# EAGLE board PiMobile.picked (EAGLE 7.5.0)
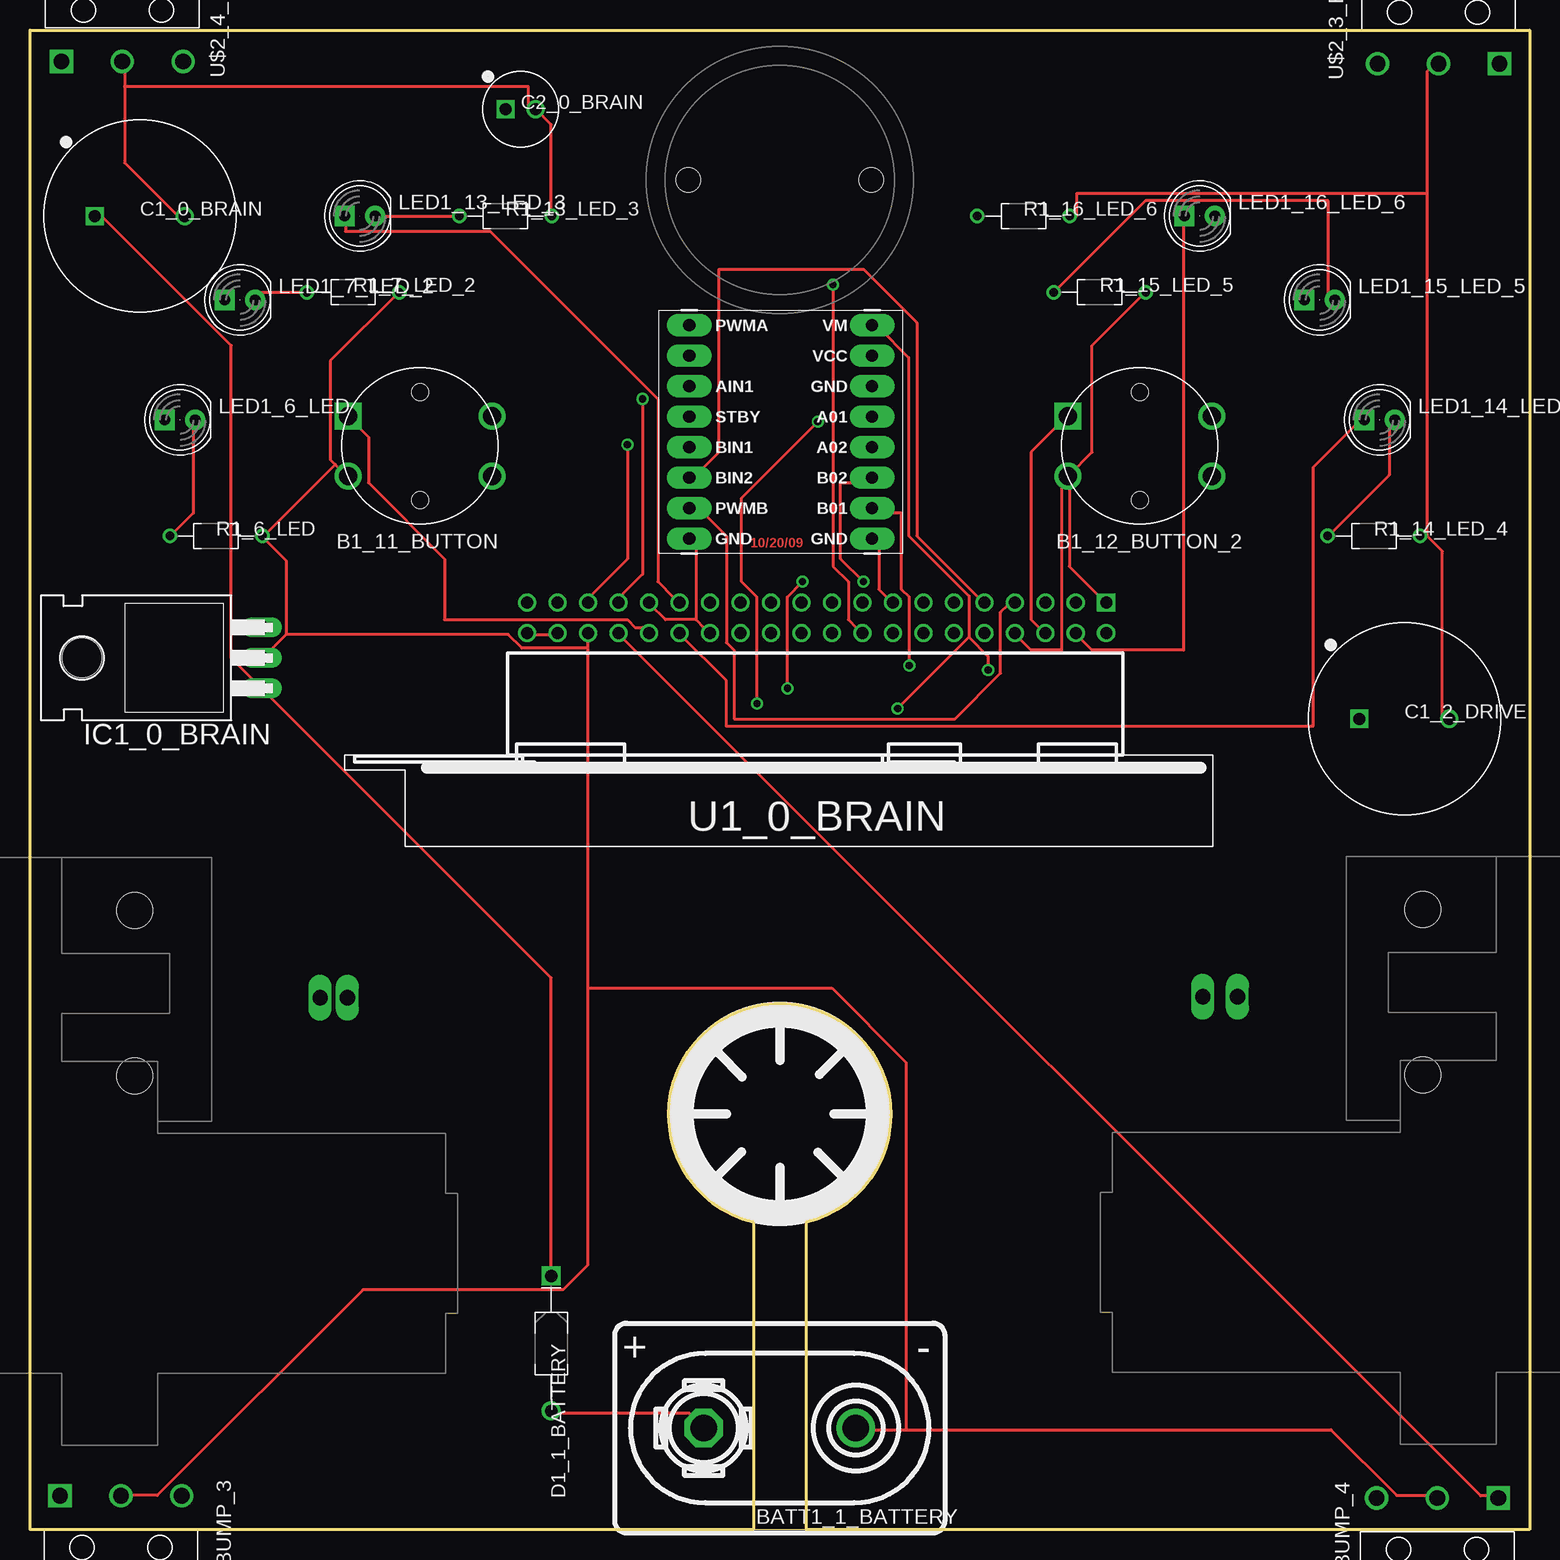
[diagram p0: board, top side]
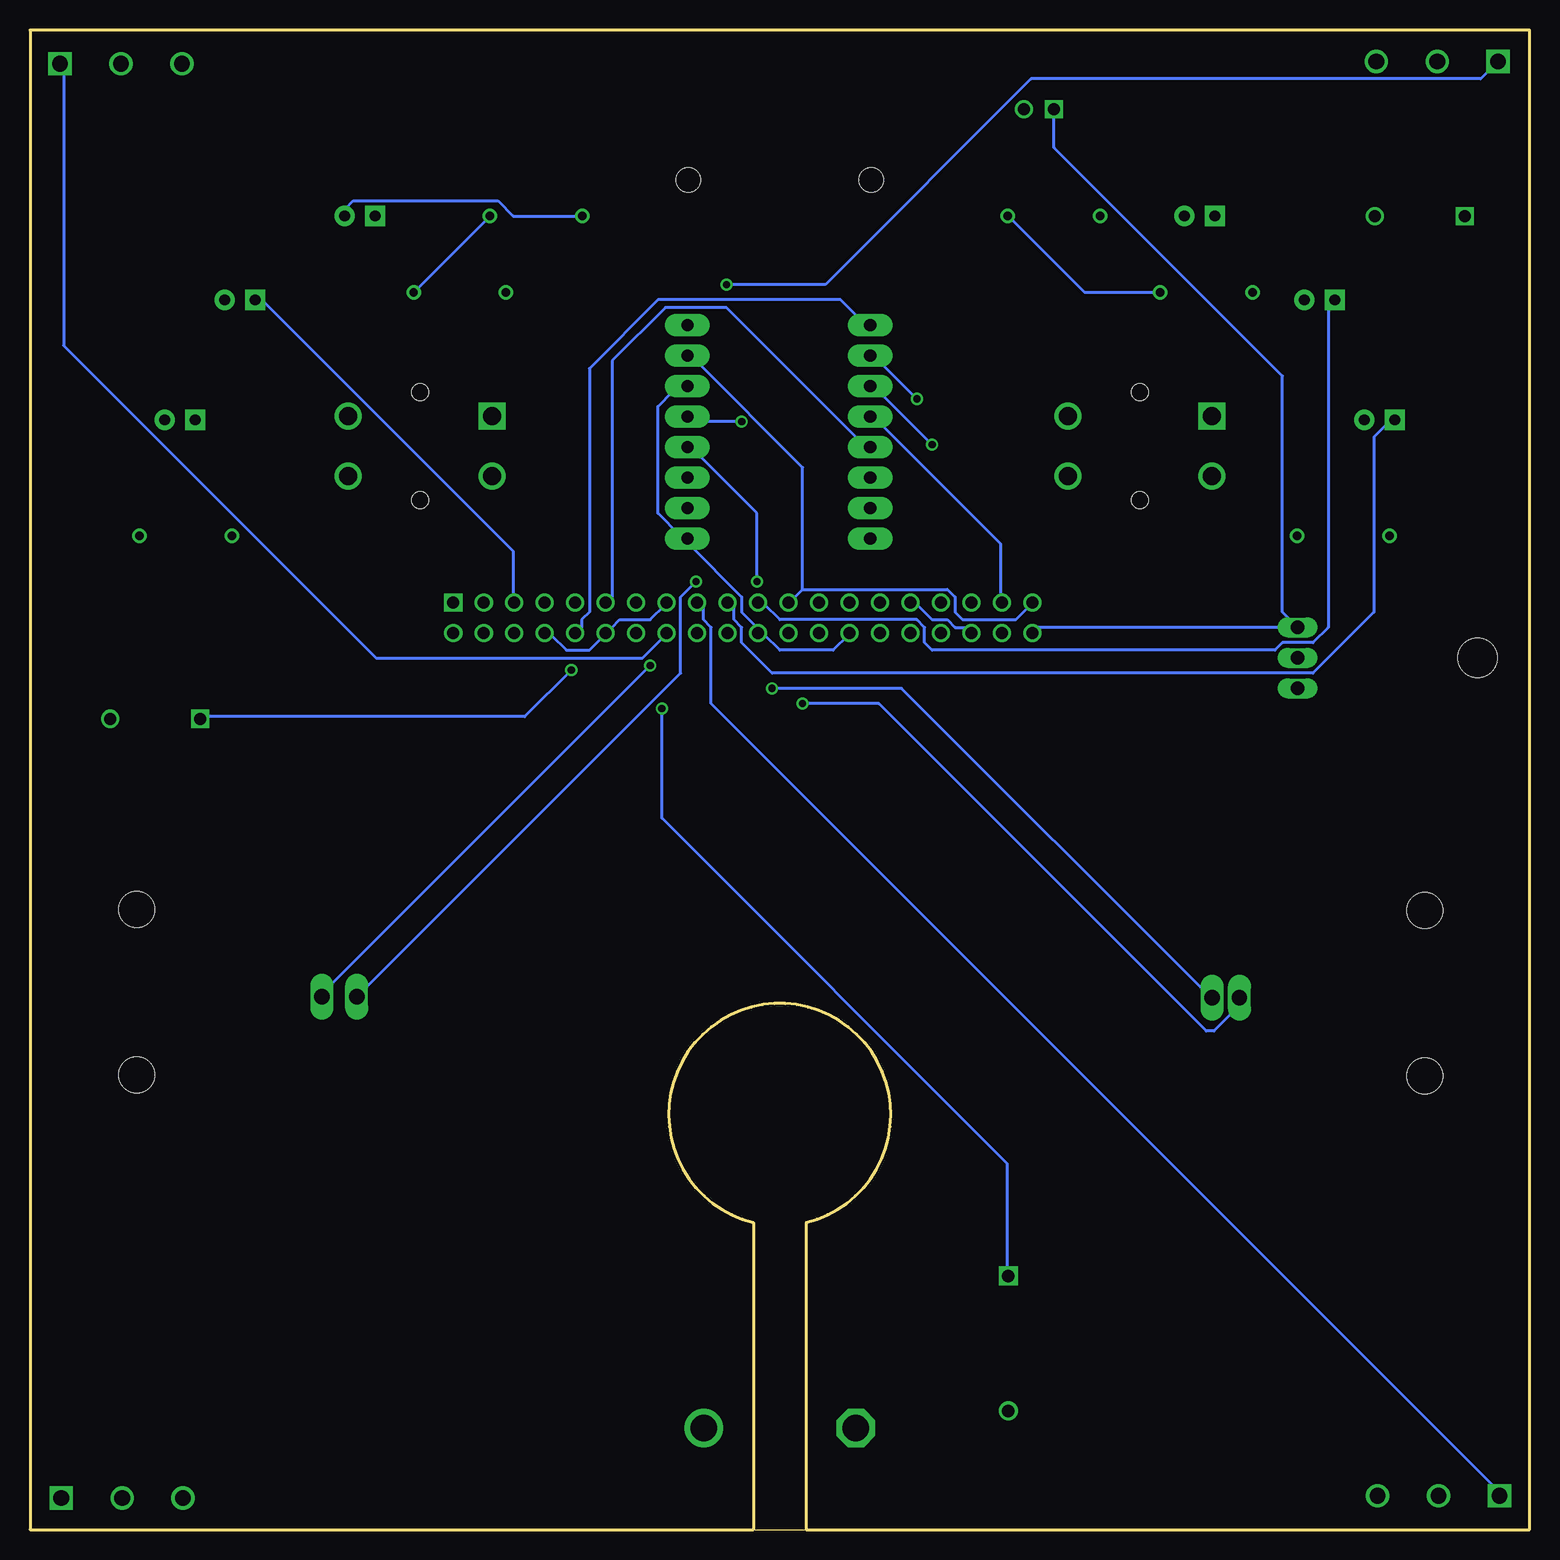
[diagram p1: board, bottom side, seen from below]

Size 125 x 125 mm. Coordinates in mm from the lower left corner, seen from the top.
Outline: 64.7,0 125,0 125,125 0,125 0,0 60.3,0
Outline: 64.7,0 60.3,0
Outline: 64.7,0 64.7,25.6 arc333 60.3,25.6 60.3,0
Copper layers (1*16): Top 0.035mm / dielectric 1.5mm / Bottom 0.035mm
Design rules "default": minimum track width 10mil, minimum drill 0.6mm, track to track 8mil, track to pad 8mil, pad to pad 8mil, via to via 8mil, smd to smd 8mil, copper to edge 40mil, drill to drill 8mil, minimum pad ring 10mil, minimum via ring 8mil, stop-mask expansion 4mil, vias tented up to drill 0mil, thermal gap 10mil

## Footprints (pad centres in the part's own frame; a part is rotated, then mirrored left to right if it is on the bottom)
BUTTON-TACTILE-ROUND-ADAFRUIT1009 = drill 1.5 square: P -6,2.5 | drill 1.5: P2 6,2.5; S -6,-2.5; S2 6,-2.5 | hole 1.4: 0,-4.5; 0,4.5
BATTERY_9V_KEYSTONE_968 = drill 2.2: N 6.35,0 | drill 2.2 octagon: P -6.35,0
CAPPRD750W80D1600H2200P = drill 1 pad 1.5 square: 1 -3.75,0 | drill 1 pad 1.5: 2 3.75,0
CAPPRD250W80D630H1220P = drill 1 pad 1.5 square: 1 -1.25,0 | drill 1 pad 1.5: 2 1.25,0
DIOAD1125W78L520D270_HS = drill 1.06 pad 1.59: A 5.625,0 | drill 1.06 pad 1.59 square: C -5.625,0
SPARKFUN_DUAL_MOTOR_DRIVER = drill 1.016 pad 1.88 long: A01 7.62,1.27; A02 7.62,-1.27; AIN1 -7.62,3.81; AIN2 -7.62,6.35; B01 7.62,-6.35; B02 7.62,-3.81; BIN1 -7.62,-1.27; BIN2 -7.62,-3.81; GND -7.62,-8.89; GND1 7.62,3.81; GND2 7.62,-8.89; PWMA -7.62,8.89; PWMB -7.62,-6.35; STBY -7.62,1.27; VCC 7.62,6.35; VM 7.62,8.89
TO220H = drill 1.118 long: 1 -2.54,-10.16; 2 0,-10.16; 3 2.54,-10.16 | hole 3.302: 0,4.826
SOLARBOTICS_G2_LEFT = drill 1.27 long: + -40.545,-3.68; - -43.45,-3.68 | hole 3: -25.1,-10.2; -25.1,3.6
LED5MM = drill 0.9 pad 1.676 square: A -1.27,0 | drill 0.9 pad 1.676: K 1.27,0
RESAD770W45L370D210_HS = drill 0.7 pad 1.1: 1 -3.85,0; 2 3.85,0
SOLARBOTICS_G2 = drill 1.27 long: + 40.545,-3.68; - 42.815,-3.68 | hole 3: 25.1,-10.2; 25.1,3.6
RPI-ZERO-EDGE-RIGHT-ANGLE = drill 1 square: P$1 -24.13,-1.27 | drill 1: P$2 -24.13,1.27; P$3 -21.59,-1.27; P$4 -21.59,1.27; P$5 -19.05,-1.27; P$6 -19.05,1.27; P$7 -16.51,-1.27; P$8 -16.51,1.27; P$9 -13.97,-1.27; P$10 -13.97,1.27; P$11 -11.43,-1.27; P$12 -11.43,1.27; P$13 -8.89,-1.27; P$14 -8.89,1.27; P$15 -6.35,-1.27; P$16 -6.35,1.27; P$17 -3.81,-1.27; P$18 -3.81,1.27; P$19 -1.27,-1.27; P$20 -1.27,1.27; P$21 1.27,-1.27; P$22 1.27,1.27; P$23 3.81,-1.27; P$24 3.81,1.27; P$25 6.35,-1.27; P$26 6.35,1.27; P$27 8.89,-1.27; P$28 8.89,1.27; P$29 11.43,-1.27; P$30 11.43,1.27; P$31 13.97,-1.27; P$32 13.97,1.27; P$33 16.51,-1.27; P$34 16.51,1.27; P$35 19.05,-1.27; P$36 19.05,1.27; P$37 21.59,-1.27; P$38 21.59,1.27; P$39 24.13,-1.27; P$40 24.13,1.27
ADAFRUIT-3/4IN-CASTER = hole 2: -7.62,0; 7.62,0
BUMP_SWITCH_OMRON_D2FLA = drill 1.3 square: A 5.08,-2.8 | drill 1.3: B 0,-2.8; NC -5.08,-2.8
BUMP_SWITCH_OMRON_D2FLA1 = drill 1.3 square: A -5.08,-2.8 | drill 1.3: B 0,-2.8; NC 5.08,-2.8

## Placement (x,y rotation side)
B1_11_BUTTON  BUTTON-TACTILE-ROUND  [BUTTON-TACTILE-ROUND-ADAFRUIT1009]  32.5,90.33 0 top
B1_12_BUTTON_2  BUTTON-TACTILE-ROUND  [BUTTON-TACTILE-ROUND-ADAFRUIT1009]  92.5,90.33 0 top
BATT1_1_BATTERY  BATTERY-9V-VERTICAL  [BATTERY_9V_KEYSTONE_968]  62.5,8.46 0 top
C1_0_BRAIN  4700uF  [CAPPRD750W80D1600H2200P]  9.16,109.49 0 top
C1_2_DRIVE  3300uF  [CAPPRD750W80D1600H2200P]  114.57,67.58 0 top
C2_0_BRAIN  100uF  [CAPPRD250W80D630H1220P]  40.91,118.38 0 top
D1_1_BATTERY  [DIOAD1125W78L520D270_HS]  43.45,15.51 270 top
DRVR_2_DRIVE  SPARKFUN_DUAL_MOTOR_DRIVER-BOB  [SPARKFUN_DUAL_MOTOR_DRIVER]  62.58,91.5 0 top
IC1_0_BRAIN  78XX-VOLTAGE_REGULATORT  [TO220H]  9.16,72.66 90 top
L_2_DRIVE  SOLARBOTICS_GM2_LEFT  [SOLARBOTICS_G2_LEFT]  141.21,48.09 0 top
LED1_6_LED  [LED5MM]  12.5,92.5 0 top
LED1_7_LED_2  [LED5MM]  17.5,102.5 0 top
LED1_13_LED_3  [LED5MM]  27.5,109.5 0 top
LED1_14_LED_4  [LED5MM]  112.5,92.5 0 top
LED1_15_LED_5  [LED5MM]  107.5,102.5 0 top
LED1_16_LED_6  [LED5MM]  97.5,109.5 0 top
R1_6_LED  330  [RESAD770W45L370D210_HS]  15.51,82.82 0 top
R1_7_LED_2  330  [RESAD770W45L370D210_HS]  26.94,103.14 0 top
R1_13_LED_3  330  [RESAD770W45L370D210_HS]  39.64,109.49 0 top
R1_14_LED_4  330  [RESAD770W45L370D210_HS]  112.03,82.82 0 top
R1_15_LED_5  330  [RESAD770W45L370D210_HS]  89.17,103.14 0 top
R1_16_LED_6  330  [RESAD770W45L370D210_HS]  82.82,109.49 0 top
R_2_DRIVE  SOLARBOTICS_GM2  [SOLARBOTICS_G2]  -16.36,48.01 0 top
U1_0_BRAIN  RASPBERRY-PI  [RPI-ZERO-EDGE-RIGHT-ANGLE]  65.58,76 180 top
U1_5_CASTER  CASTERADAFRUIT-3/4IN  [ADAFRUIT-3/4IN-CASTER]  62.5,112.5 0 top
U1_10_PENHOLDER  PENHOLDER  [PENHOLDER]  62.5,34.64 0 top
U$2_3_BUMP  BUMP_SWITCH-MEDIUM-LEFT  [BUMP_SWITCH_OMRON_D2FLA]  117.43,124.99 0 top
U$2_4_BUMP_2  BUMP_SWITCH-MEDIUM-RIGHT  [BUMP_SWITCH_OMRON_D2FLA1]  7.69,125.18 0 top
U$2_8_BUMP_3  BUMP_SWITCH-MEDIUM-LEFT  [BUMP_SWITCH_OMRON_D2FLA]  7.57,0.01 180 top
U$2_9_BUMP_4  BUMP_SWITCH-MEDIUM-RIGHT  [BUMP_SWITCH_OMRON_D2FLA1]  117.32,-0.17 180 top

## Library data of the parts
B1_11_BUTTON = Components; DIST: Adafruit; DISTPN: 1009; HIERARCHY_NAME: button.B1
B1_12_BUTTON_2 = Components; DIST: Adafruit; DISTPN: 1009; HIERARCHY_NAME: button_2.B1
BATT1_1_BATTERY = Components; HIERARCHY_NAME: battery.BATT1
C1_0_BRAIN = KoalaBuild; DATASHEET: http://industrial.panasonic.com/www-cgi/jvcr13pz.cgi?E+PZ+3+ABA0012+ECA1EM472+7+WW; DATA_SHEET: http://industrial.panasonic.com/www-cgi/jvcr13pz.cgi?E+PZ+3+ABA0012+ECA1EM472+7+WW; DB: /home/michael/gtron_devel/Gadgets/Tools/Koala/Koala/PartLibrary/Digikey/Capacitors-AluminumTH.csv; DEVICE: TH-RADIAL_ALUMINUM_16MM; DIST: Digikey; DISTPN: P5159-ND; HIERARCHY_NAME: brain.C1; IMAGE: http://media.digikey.com/Photos/Panasonic%20Photos/ECA-1CM472.jpg; MFR: Panasonic Electronic Components; MIN_QTY: 1; MPN: ECA-1EM472; PACKAGE: CAPPRD750W80D1600H2200P; PRICE: $1.58; SIZE: TH; STOCK: STOCK; TOL: 20%; VALUE_QUERY: >4500uF; VOLTS: ( >= 5)V
C1_2_DRIVE = KoalaBuild; DATASHEET: http://industrial.panasonic.com/www-cgi/jvcr13pz.cgi?E+PZ+3+ABA0012+ECA1EM332+7+WW; DATA_SHEET: http://industrial.panasonic.com/www-cgi/jvcr13pz.cgi?E+PZ+3+ABA0012+ECA1EM332+7+WW; DB: /home/michael/gtron_devel/Gadgets/Tools/Koala/Koala/PartLibrary/Digikey/Capacitors-AluminumTH.csv; DEVICE: TH-RADIAL_ALUMINUM_16MM; DIST: Digikey; DISTPN: P5158-ND; HIERARCHY_NAME: drive.C1; IMAGE: http://media.digikey.com/Photos/Panasonic%20Photos/ECA-1CM472.jpg; MFR: Panasonic Electronic Components; MIN_QTY: 1; MPN: ECA-1EM332; PACKAGE: CAPPRD750W80D1600H2200P; PRICE: $1.13; SIZE: TH; STOCK: STOCK; TOL: 20%; VALUE_QUERY: >3000uF; VOLTS: ( >= 5)V
C2_0_BRAIN = KoalaBuild; DATASHEET: http://industrial.panasonic.com/www-cgi/jvcr13pz.cgi?E+PZ+3+ABA0012+ECA1EM101+7+WW; DATA_SHEET: http://industrial.panasonic.com/www-cgi/jvcr13pz.cgi?E+PZ+3+ABA0012+ECA1EM101+7+WW; DB: /home/michael/gtron_devel/Gadgets/Tools/Koala/Koala/PartLibrary/Digikey/Capacitors-AluminumTH.csv; DEVICE: TH-RADIAL_ALUMINUM_6.3MM; DIST: Digikey; DISTPN: P5152-ND; HIERARCHY_NAME: brain.C2; IMAGE: http://media.digikey.com/Photos/Panasonic%20Photos/ECA-1EM101B.JPG; MFR: Panasonic Electronic Components; MIN_QTY: 1; MPN: ECA-1EM101; PACKAGE: CAPPRD250W80D630H1220P; PRICE: $0.25; SIZE: TH; STOCK: STOCK; TOL: 20%; VALUE_QUERY: >10uF; VOLTS: ( >= 5)V
D1_1_BATTERY = KoalaBuild; DATASHEET: http://www.st.com/web/en/resource/technical/document/datasheet/CD00001625.pdf; DATA_SHEET: http://www.st.com/web/en/resource/technical/document/datasheet/CD00001625.pdf; DB: /home/michael/gtron_devel/Gadgets/Tools/Koala/Koala/PartLibrary/Digikey/Schottky-Diodes-TH.csv; DEVICE: TH-DO-41-AND-DO-204AL; DIST: Digikey; DISTPN: 497-4547-1-ND; HIERARCHY_NAME: battery.D1; IMAGE: http://media.digikey.com/photos/STMicro%20Photos/1N5819.JPG; IRECT: 1A; MFR: STMicroelectronics; MIN_QTY: 1; MPN: 1N5817; PACKAGE: DIOAD1125W78L520D270_HS; PRICE: $0.57; SIZE: TH; STOCK: STOCK; VALUE: 450mV; VREV: 20V
DRVR_2_DRIVE = BOBs; DIST: Sparkfun; DISTPN: 9457; HIERARCHY_NAME: drive.DRVR
IC1_0_BRAIN = Components; DIST: Adafruit; DISTPN: 2164; HIERARCHY_NAME: brain.IC1
L_2_DRIVE = Components; DIST: Solarbotics; DISTPN: gm2; HIERARCHY_NAME: drive.L
LED1_6_LED = Components; DIST: Adafruit; DISTPN: 298; HIERARCHY_NAME: led.LED1
LED1_7_LED_2 = Components; DIST: Adafruit; DISTPN: 298; HIERARCHY_NAME: led_2.LED1
LED1_13_LED_3 = Components; DIST: Adafruit; DISTPN: 298; HIERARCHY_NAME: led_3.LED1
LED1_14_LED_4 = Components; DIST: Adafruit; DISTPN: 298; HIERARCHY_NAME: led_4.LED1
LED1_15_LED_5 = Components; DIST: Adafruit; DISTPN: 298; HIERARCHY_NAME: led_5.LED1
LED1_16_LED_6 = Components; DIST: Adafruit; DISTPN: 298; HIERARCHY_NAME: led_6.LED1
R1_6_LED = KoalaBuild; CASE: TH; DATASHEET: http://www.yageo.com/NewPortal/yageodocoutput?fileName=/pdf/throughhole/Yageo_LR_CFR_2013.pdf; DATA_SHEET: http://www.yageo.com/NewPortal/yageodocoutput?fileName=/pdf/throughhole/Yageo_LR_CFR_2013.pdf; DB: /home/michael/gtron_devel/Gadgets/Tools/Koala/Koala/PartLibrary/Digikey/Resistors-TH.csv; DEVICE: TH-1/6W-CARBON; DIST: Digikey; DISTPN: 330EBK-ND; HIERARCHY_NAME: led.R1; IMAGE: http://media.digikey.com/Renders/Yageo%20Renders/CFR-12JR-330R.jpg; MFR: Yageo; MIN_QTY: 1; MPN: CFR-12JB-52-330R; PACKAGE: RESAD770W45L370D210_HS; PRICE: $0.10; PWR: 167mW; SIZE: TH; STOCK: STOCK; TOL: 5%; VALUE_QUERY: 330
R1_7_LED_2 = KoalaBuild; CASE: TH; DATASHEET: http://www.yageo.com/NewPortal/yageodocoutput?fileName=/pdf/throughhole/Yageo_LR_CFR_2013.pdf; DATA_SHEET: http://www.yageo.com/NewPortal/yageodocoutput?fileName=/pdf/throughhole/Yageo_LR_CFR_2013.pdf; DB: /home/michael/gtron_devel/Gadgets/Tools/Koala/Koala/PartLibrary/Digikey/Resistors-TH.csv; DEVICE: TH-1/6W-CARBON; DIST: Digikey; DISTPN: 330EBK-ND; HIERARCHY_NAME: led_2.R1; IMAGE: http://media.digikey.com/Renders/Yageo%20Renders/CFR-12JR-330R.jpg; MFR: Yageo; MIN_QTY: 1; MPN: CFR-12JB-52-330R; PACKAGE: RESAD770W45L370D210_HS; PRICE: $0.10; PWR: 167mW; SIZE: TH; STOCK: STOCK; TOL: 5%; VALUE_QUERY: 330
R1_13_LED_3 = KoalaBuild; CASE: TH; DATASHEET: http://www.yageo.com/NewPortal/yageodocoutput?fileName=/pdf/throughhole/Yageo_LR_CFR_2013.pdf; DATA_SHEET: http://www.yageo.com/NewPortal/yageodocoutput?fileName=/pdf/throughhole/Yageo_LR_CFR_2013.pdf; DB: /home/michael/gtron_devel/Gadgets/Tools/Koala/Koala/PartLibrary/Digikey/Resistors-TH.csv; DEVICE: TH-1/6W-CARBON; DIST: Digikey; DISTPN: 330EBK-ND; HIERARCHY_NAME: led_3.R1; IMAGE: http://media.digikey.com/Renders/Yageo%20Renders/CFR-12JR-330R.jpg; MFR: Yageo; MIN_QTY: 1; MPN: CFR-12JB-52-330R; PACKAGE: RESAD770W45L370D210_HS; PRICE: $0.10; PWR: 167mW; SIZE: TH; STOCK: STOCK; TOL: 5%; VALUE_QUERY: 330
R1_14_LED_4 = KoalaBuild; CASE: TH; DATASHEET: http://www.yageo.com/NewPortal/yageodocoutput?fileName=/pdf/throughhole/Yageo_LR_CFR_2013.pdf; DATA_SHEET: http://www.yageo.com/NewPortal/yageodocoutput?fileName=/pdf/throughhole/Yageo_LR_CFR_2013.pdf; DB: /home/michael/gtron_devel/Gadgets/Tools/Koala/Koala/PartLibrary/Digikey/Resistors-TH.csv; DEVICE: TH-1/6W-CARBON; DIST: Digikey; DISTPN: 330EBK-ND; HIERARCHY_NAME: led_4.R1; IMAGE: http://media.digikey.com/Renders/Yageo%20Renders/CFR-12JR-330R.jpg; MFR: Yageo; MIN_QTY: 1; MPN: CFR-12JB-52-330R; PACKAGE: RESAD770W45L370D210_HS; PRICE: $0.10; PWR: 167mW; SIZE: TH; STOCK: STOCK; TOL: 5%; VALUE_QUERY: 330
R1_15_LED_5 = KoalaBuild; CASE: TH; DATASHEET: http://www.yageo.com/NewPortal/yageodocoutput?fileName=/pdf/throughhole/Yageo_LR_CFR_2013.pdf; DATA_SHEET: http://www.yageo.com/NewPortal/yageodocoutput?fileName=/pdf/throughhole/Yageo_LR_CFR_2013.pdf; DB: /home/michael/gtron_devel/Gadgets/Tools/Koala/Koala/PartLibrary/Digikey/Resistors-TH.csv; DEVICE: TH-1/6W-CARBON; DIST: Digikey; DISTPN: 330EBK-ND; HIERARCHY_NAME: led_5.R1; IMAGE: http://media.digikey.com/Renders/Yageo%20Renders/CFR-12JR-330R.jpg; MFR: Yageo; MIN_QTY: 1; MPN: CFR-12JB-52-330R; PACKAGE: RESAD770W45L370D210_HS; PRICE: $0.10; PWR: 167mW; SIZE: TH; STOCK: STOCK; TOL: 5%; VALUE_QUERY: 330
R1_16_LED_6 = KoalaBuild; CASE: TH; DATASHEET: http://www.yageo.com/NewPortal/yageodocoutput?fileName=/pdf/throughhole/Yageo_LR_CFR_2013.pdf; DATA_SHEET: http://www.yageo.com/NewPortal/yageodocoutput?fileName=/pdf/throughhole/Yageo_LR_CFR_2013.pdf; DB: /home/michael/gtron_devel/Gadgets/Tools/Koala/Koala/PartLibrary/Digikey/Resistors-TH.csv; DEVICE: TH-1/6W-CARBON; DIST: Digikey; DISTPN: 330EBK-ND; HIERARCHY_NAME: led_6.R1; IMAGE: http://media.digikey.com/Renders/Yageo%20Renders/CFR-12JR-330R.jpg; MFR: Yageo; MIN_QTY: 1; MPN: CFR-12JB-52-330R; PACKAGE: RESAD770W45L370D210_HS; PRICE: $0.10; PWR: 167mW; SIZE: TH; STOCK: STOCK; TOL: 5%; VALUE_QUERY: 330
R_2_DRIVE = Components; DIST: Solarbotics; DISTPN: gm2; HIERARCHY_NAME: drive.R
U1_0_BRAIN = BOBs; HIERARCHY_NAME: brain.U1
U1_5_CASTER = Components; DIST: Adafruit; DISTPN: 1200; HIERARCHY_NAME: caster.u1
U1_10_PENHOLDER = Components; HIERARCHY_NAME: penholder.u1
U$2_3_BUMP = Components; DIST: Digikey; DISTPN: SW843-ND; HIERARCHY_NAME: bump.U$2
U$2_4_BUMP_2 = Components; DIST: Digikey; DISTPN: SW842-ND; HIERARCHY_NAME: bump_2.U$2
U$2_8_BUMP_3 = Components; DIST: Digikey; DISTPN: SW843-ND; HIERARCHY_NAME: bump_3.U$2
U$2_9_BUMP_4 = Components; DIST: Digikey; DISTPN: SW842-ND; HIERARCHY_NAME: bump_4.U$2

## Nets
3V3_0_BRAIN: DRVR_2_DRIVE.VCC U1_0_BRAIN.P$23 U1_0_BRAIN.P$39
5V_0_BRAIN: C2_0_BRAIN.1 IC1_0_BRAIN.3 U1_0_BRAIN.P$38 U1_0_BRAIN.P$40
!CE0!/GPIO8_0_BRAIN: U1_0_BRAIN.P$18 U$2_4_BUMP_2.A
!CE!/GPIO7_0_BRAIN: U1_0_BRAIN.P$16 U$2_3_BUMP.A
A01_2_DRIVE: DRVR_2_DRIVE.A01 R_2_DRIVE.+
A02_2_DRIVE: DRVR_2_DRIVE.A02 R_2_DRIVE.-
B01_2_DRIVE: DRVR_2_DRIVE.B01 L_2_DRIVE.+
B02_2_DRIVE: DRVR_2_DRIVE.B02 L_2_DRIVE.-
GEN4/GPIO23_0_BRAIN: U1_0_BRAIN.P$26
GEN5/GPIO24_0_BRAIN: U1_0_BRAIN.P$24
GEN/6GPIO25_0_BRAIN: U1_0_BRAIN.P$20
GND_0_BRAIN: B1_11_BUTTON.S B1_12_BUTTON_2.S BATT1_1_BATTERY.N C1_0_BRAIN.2 C1_2_DRIVE.2 C2_0_BRAIN.2 DRVR_2_DRIVE.GND DRVR_2_DRIVE.GND1 DRVR_2_DRIVE.GND2 IC1_0_BRAIN.2 R1_6_LED.2 R1_7_LED_2.2 R1_13_LED_3.2 R1_14_LED_4.2 R1_15_LED_5.2 R1_16_LED_6.2 U1_0_BRAIN.P$1 U1_0_BRAIN.P$8 U1_0_BRAIN.P$12 U1_0_BRAIN.P$15 U1_0_BRAIN.P$22 U1_0_BRAIN.P$28 U1_0_BRAIN.P$31 U1_0_BRAIN.P$36 U$2_3_BUMP.B U$2_4_BUMP_2.B U$2_8_BUMP_3.B U$2_9_BUMP_4.B
GPIO2/SDA1_0_BRAIN: DRVR_2_DRIVE.STBY U1_0_BRAIN.P$37
GPIO3/SCL1_0_BRAIN: DRVR_2_DRIVE.AIN1 U1_0_BRAIN.P$35
GPIO4/GCKL_0_BRAIN: DRVR_2_DRIVE.AIN2 U1_0_BRAIN.P$33
GPIO5_0_BRAIN: DRVR_2_DRIVE.BIN1 U1_0_BRAIN.P$11
GPIO6_0_BRAIN: DRVR_2_DRIVE.BIN2 U1_0_BRAIN.P$9
GPIO9/MISO_0_BRAIN: LED1_6_LED.A U1_0_BRAIN.P$19
GPIO10/MOSI_0_BRAIN: LED1_7_LED_2.A U1_0_BRAIN.P$21
GPIO11/SCLK_0_BRAIN: U1_0_BRAIN.P$17 U$2_8_BUMP_3.A
GPIO12_0_BRAIN: DRVR_2_DRIVE.PWMA U1_0_BRAIN.P$10
GPIO13_0_BRAIN: DRVR_2_DRIVE.PWMB U1_0_BRAIN.P$7
GPIO16_0_BRAIN: B1_12_BUTTON_2.P U1_0_BRAIN.P$6
GPIO17/GEN0_0_BRAIN: LED1_13_LED_3.A U1_0_BRAIN.P$29
GPIO18_0_BRAIN: LED1_14_LED_4.A U1_0_BRAIN.P$30
GPIO19_0_BRAIN: LED1_15_LED_5.A U1_0_BRAIN.P$5
GPIO20_0_BRAIN: LED1_16_LED_6.A U1_0_BRAIN.P$4
GPIO21_0_BRAIN: U1_0_BRAIN.P$2
GPIO22/GEN3_0_BRAIN: U1_0_BRAIN.P$25
GPIO26_0_BRAIN: U1_0_BRAIN.P$3
GPIO27/GEN2_0_BRAIN: U1_0_BRAIN.P$27
N$1_1_BATTERY: BATT1_1_BATTERY.P D1_1_BATTERY.A
N$1_6_LED: LED1_6_LED.K R1_6_LED.1
N$1_7_LED_2: LED1_7_LED_2.K R1_7_LED_2.1
N$1_13_LED_3: LED1_13_LED_3.K R1_13_LED_3.1
N$1_14_LED_4: LED1_14_LED_4.K R1_14_LED_4.1
N$1_15_LED_5: LED1_15_LED_5.K R1_15_LED_5.1
N$1_16_LED_6: LED1_16_LED_6.K R1_16_LED_6.1
POS_1_BATTERY: C1_0_BRAIN.1 C1_2_DRIVE.1 D1_1_BATTERY.C DRVR_2_DRIVE.VM IC1_0_BRAIN.1
RXD0/GPIO15_0_BRAIN: B1_11_BUTTON.P U1_0_BRAIN.P$32
TXD0/GPIO14_0_BRAIN: U1_0_BRAIN.P$34 U$2_9_BUMP_4.A

## Tracks (layer width: path | path; a pad name or v marks a point on that pad's centre or on a via)
3V3_0_BRAIN
  Bottom 0.254: 60.59,78.38 48.53,78.38 47.89,77.74 47.89,76.47 47.26,75.84 42.81,75.84 41.55,77.11 U1_0_BRAIN.P$39 | 60.59,78.38 61.23,77.74 U1_0_BRAIN.P$23 | 60.59,78.38 60.59,88.53 69.48,97.42 70.12,97.42 DRVR_2_DRIVE.VCC
5V_0_BRAIN
  Top 0.254: U1_0_BRAIN.P$40 41.55,74.56 43.45,74.56 U1_0_BRAIN.P$38
  Bottom 0.254: C2_0_BRAIN.1 39.64,118.38 39.64,115.2 20.59,96.16 20.59,76.47 IC1_0_BRAIN.3 40.91,75.2 U1_0_BRAIN.P$40
!CE0!/GPIO8_0_BRAIN  (via drill 0.6)
  Top 0.254: v66.94,103.78 66.94,80.28 68.22,79.01 68.22,75.84 68.85,75.2 U1_0_BRAIN.P$18
  Bottom 0.254: v66.94,103.78 58.69,103.78 41.55,120.92 4.08,120.92 2.81,122.19 U$2_4_BUMP_2.A
!CE!/GPIO7_0_BRAIN
  Bottom 0.254: U1_0_BRAIN.P$16 72.03,74.56 73.93,72.66 96.16,72.66 122.19,98.69 122.19,122.19 U$2_3_BUMP.A
A01_2_DRIVE  (via drill 0.6)
  Top 0.254: v65.67,92.34 59.33,86 59.33,79.01 60.59,77.74 v60.59,68.85
  Bottom 0.254: v65.67,92.34 70.12,92.34 DRVR_2_DRIVE.A01 | v60.59,68.85 54.24,68.85 26.94,41.55 26.3,41.55 23.77,44.09 R_2_DRIVE.+
A02_2_DRIVE  (via drill 0.6)
  Top 0.254: v64.41,79.01 63.13,77.74 v63.13,70.12
  Bottom 0.254: v64.41,79.01 64.41,84.72 69.48,89.81 70.12,89.81 DRVR_2_DRIVE.A02 | v63.13,70.12 52.34,70.12 26.94,44.72 R_2_DRIVE.-
B01_2_DRIVE  (via drill 0.6)
  Top 0.254: v73.3,72.03 73.3,77.74 72.66,78.38 72.66,84.72 70.75,84.72 DRVR_2_DRIVE.B01
  Bottom 0.254: v73.3,72.03 100.6,44.72 L_2_DRIVE.+
B02_2_DRIVE  (via drill 0.6)
  Top 0.254: v69.48,79.01 67.58,80.91 67.58,87.27 70.12,87.27 DRVR_2_DRIVE.B02
  Bottom 0.254: v69.48,79.01 70.75,77.74 70.75,71.39 97.42,44.72 L_2_DRIVE.-
GND_0_BRAIN
  Top 0.254: 7.89,120.28 7.89,122.19 U$2_4_BUMP_2.B | 7.89,120.28 7.89,113.94 12.34,109.49 C1_0_BRAIN.2 | R1_13_LED_3.2 43.45,109.49 43.45,117.11 42.18,118.38 C2_0_BRAIN.2 41.55,118.38 41.55,120.28 7.89,120.28 | 25.44,88.76 25.03,89.17 25.03,97.42 30.75,103.14 R1_7_LED_2.2 | 25.44,88.76 26.3,87.9 B1_11_BUTTON.S | 116.47,82.82 117.75,81.55 117.75,67.58 C1_2_DRIVE.2 | 116.47,82.82 116.47,111.4 | 116.47,111.4 116.47,121.56 117.11,122.19 U$2_3_BUMP.B | 116.47,82.82 R1_14_LED_4.2 | 55.52,75.84 56.15,75.2 U1_0_BRAIN.P$28 | 55.52,75.84 55.52,82.19 DRVR_2_DRIVE.GND | 55.52,75.84 52.98,75.84 51.7,77.11 U1_0_BRAIN.P$31 | U1_0_BRAIN.P$15 71.39,77.74 70.75,78.38 70.75,82.19 DRVR_2_DRIVE.GND2 | U1_0_BRAIN.P$1 89.17,77.74 86.63,80.28 86.63,87.27 B1_12_BUTTON_2.S | U1_0_BRAIN.P$8 82.19,74.56 83.45,73.3 86,73.3 86,87.27 B1_12_BUTTON_2.S | R1_15_LED_5.2 92.98,103.14 88.53,98.69 88.53,89.81 86.63,87.9 B1_12_BUTTON_2.S | 116.47,111.4 87.27,111.4 87.27,109.49 R1_16_LED_6.2 | 73.02,8.32 68.9,8.32 BATT1_1_BATTERY.N | 73.02,8.32 108.45,8.32 113.94,2.84 117.13,2.84 U$2_9_BUMP_4.B | 25.44,88.76 19.52,82.84 R1_6_LED.2 19.52,82.62 21.35,80.79 21.35,74.62 | 25.47,88.79 25.44,88.76 | 21.35,74.62 19.52,72.79 IC1_0_BRAIN.2 | 46.5,73.47 46.5,74.62 U1_0_BRAIN.P$36 | 46.5,73.47 46.5,45.13 | 46.5,45.13 46.5,22.04 44.44,19.98 27.75,19.98 10.61,2.84 7.64,2.84 U$2_8_BUMP_3.B | 21.35,74.62 39.87,74.62 41.01,73.47 46.5,73.47 | 73.02,8.32 73.02,38.95 66.84,45.13 46.5,45.13
  Bottom 0.254: R1_7_LED_2.2 37.1,103.14 43.45,109.49 R1_13_LED_3.2 | U1_0_BRAIN.P$36 46.62,75.2 47.89,75.2 48.53,75.84 49.8,75.84 51.07,77.11 U1_0_BRAIN.P$31 | U1_0_BRAIN.P$28 56.78,74.56 58.05,73.3 62.5,73.3 63.77,74.56 U1_0_BRAIN.P$22 64.41,75.2 65.67,76.47 65.67,77.74 70.12,82.19 DRVR_2_DRIVE.GND2 70.75,82.82 72.66,84.72 72.66,93.61 71.39,94.88 70.75,94.88 DRVR_2_DRIVE.GND1 | R1_15_LED_5.2 92.98,103.14 86.63,109.49 R1_16_LED_6.2 | U1_0_BRAIN.P$8 81.55,74.56 80.28,73.3 78.38,73.3 77.11,74.56 U1_0_BRAIN.P$12 76.47,75.2 75.84,75.84 73.3,75.84 72.03,77.11 U1_0_BRAIN.P$15
GPIO2/SDA1_0_BRAIN
  Bottom 0.254: U1_0_BRAIN.P$37 44.09,77.74 44.09,82.19 54.88,92.98 DRVR_2_DRIVE.STBY
GPIO3/SCL1_0_BRAIN  (via drill 0.6)
  Top 0.254: v49.8,90.44 49.8,80.91 46.62,77.74 U1_0_BRAIN.P$35
  Bottom 0.254: v49.8,90.44 54.88,95.52 DRVR_2_DRIVE.AIN1
GPIO4/GCKL_0_BRAIN  (via drill 0.6)
  Top 0.254: v51.07,94.25 51.07,79.64 49.16,77.74 U1_0_BRAIN.P$33
  Bottom 0.254: v51.07,94.25 54.88,98.06 DRVR_2_DRIVE.AIN2
GPIO5_0_BRAIN
  Bottom 0.254: U1_0_BRAIN.P$11 76.47,77.74 76.47,97.42 72.03,101.87 66.94,101.87 55.52,90.44 DRVR_2_DRIVE.BIN1
GPIO6_0_BRAIN
  Top 0.254: U1_0_BRAIN.P$9 79.01,77.74 73.93,82.82 73.93,100.6 69.48,105.05 57.42,105.05 57.42,89.81 55.52,87.9 DRVR_2_DRIVE.BIN2
GPIO9/MISO_0_BRAIN
  Bottom 0.254: U1_0_BRAIN.P$19 66.31,77.11 66.31,75.84 65.67,75.2 65.67,73.93 63.13,71.39 18.05,71.39 12.97,76.47 12.97,91.08 11.7,92.34 LED1_6_LED.A
GPIO10/MOSI_0_BRAIN
  Bottom 0.254: U1_0_BRAIN.P$21 63.77,77.11 62.5,75.84 51.07,75.84 50.44,75.2 50.44,73.93 49.8,73.3 21.23,73.3 20.59,73.93 18.05,73.93 16.78,75.2 16.78,101.87 LED1_7_LED_2.A
GPIO11/SCLK_0_BRAIN
  Bottom 0.254: U1_0_BRAIN.P$17 68.85,77.11 68.85,75.84 68.22,75.2 68.22,68.85 2.81,3.45 U$2_8_BUMP_3.A
GPIO12_0_BRAIN
  Bottom 0.254: U1_0_BRAIN.P$10 79.01,75.2 79.01,75.84 78.38,76.47 78.38,96.79 72.66,102.5 57.42,102.5 55.52,100.6 DRVR_2_DRIVE.PWMA
GPIO13_0_BRAIN
  Top 0.254: U1_0_BRAIN.P$7 81.55,77.11 80.91,76.47 80.91,71.39 77.11,67.58 58.69,67.58 58.69,73.3 58.05,73.93 58.05,82.82 55.52,85.36 DRVR_2_DRIVE.PWMB
GPIO16_0_BRAIN
  Top 0.254: U1_0_BRAIN.P$6 84.09,75.2 83.45,75.84 83.45,89.81 86,92.34 B1_12_BUTTON_2.P
GPIO17/GEN0_0_BRAIN
  Top 0.254: U1_0_BRAIN.P$29 53.61,77.74 52.34,79.01 52.34,94.25 38.37,108.22 26.3,108.22 26.3,109.49 LED1_13_LED_3.A
GPIO18_0_BRAIN
  Top 0.254: U1_0_BRAIN.P$30 54.24,74.56 58.05,70.75 58.05,66.94 106.95,66.94 106.95,88.53 110.76,92.34 LED1_14_LED_4.A
GPIO19_0_BRAIN
  Bottom 0.254: U1_0_BRAIN.P$5 84.72,77.74 84.72,81.55 105.68,102.5 LED1_15_LED_5.A
GPIO20_0_BRAIN
  Top 0.254: U1_0_BRAIN.P$4 87.27,74.56 88.53,73.3 96.16,73.3 96.16,109.49 LED1_16_LED_6.A
N$1_1_BATTERY
  Top 0.254: D1_1_BATTERY.A 43.53,9.69 54.96,9.69 56.1,8.55 BATT1_1_BATTERY.P
N$1_6_LED
  Top 0.254: R1_6_LED.1 11.7,82.82 13.6,84.72 13.6,92.34 LED1_6_LED.K
N$1_7_LED_2
  Top 0.254: R1_7_LED_2.1 19.32,103.14 19.32,102.5 LED1_7_LED_2.K
N$1_13_LED_3
  Top 0.254: R1_13_LED_3.1 28.84,109.49 LED1_13_LED_3.K
N$1_14_LED_4
  Top 0.254: R1_14_LED_4.1 108.22,82.82 113.3,87.9 113.3,92.34 LED1_14_LED_4.K
N$1_15_LED_5
  Top 0.254: R1_15_LED_5.1 85.36,103.14 92.98,110.76 108.22,110.76 108.22,102.5 LED1_15_LED_5.K
N$1_16_LED_6
  Bottom 0.254: R1_16_LED_6.1 84.72,109.49 86,110.76 98.06,110.76 98.69,110.12 LED1_16_LED_6.K
POS_1_BATTERY  (via drill 0.6)
  Top 0.254: C1_0_BRAIN.1 5.98,109.49 16.78,98.69 16.78,72.66 IC1_0_BRAIN.1 43.45,45.99 D1_1_BATTERY.C | v79.87,71.64 79.87,72.79 78.27,74.39 | 78.27,74.39 78.27,77.82 73.24,82.84 73.24,97.7 70.73,100.22 70.27,100.22 DRVR_2_DRIVE.VM | v72.33,68.44 78.27,74.39
  Bottom 0.254: v79.87,71.64 83.76,67.76 110.73,67.76 C1_2_DRIVE.1 | v72.33,68.44 72.33,59.3 43.53,30.5 43.53,21.35 D1_1_BATTERY.C
RXD0/GPIO15_0_BRAIN
  Top 0.254: U1_0_BRAIN.P$32 51.07,75.2 50.44,75.2 49.8,75.84 34.56,75.84 34.56,80.91 28.21,87.27 28.21,91.08 26.94,92.34 B1_11_BUTTON.P
TXD0/GPIO14_0_BRAIN
  Top 0.254: U1_0_BRAIN.P$34 49.16,74.56 120.92,2.81 122.19,2.81 U$2_9_BUMP_4.A